# Altium PCB Switch.PcbDoc
Units mm, origin at the board's own origin, x right, y up, seen from the top; angles counter-clockwise.
Board outline 152.4 x 101.6 mm, 2 copper layers (Top Layer, Bottom Layer); 37 components, 15 nets, 84 pads, 28 vias.
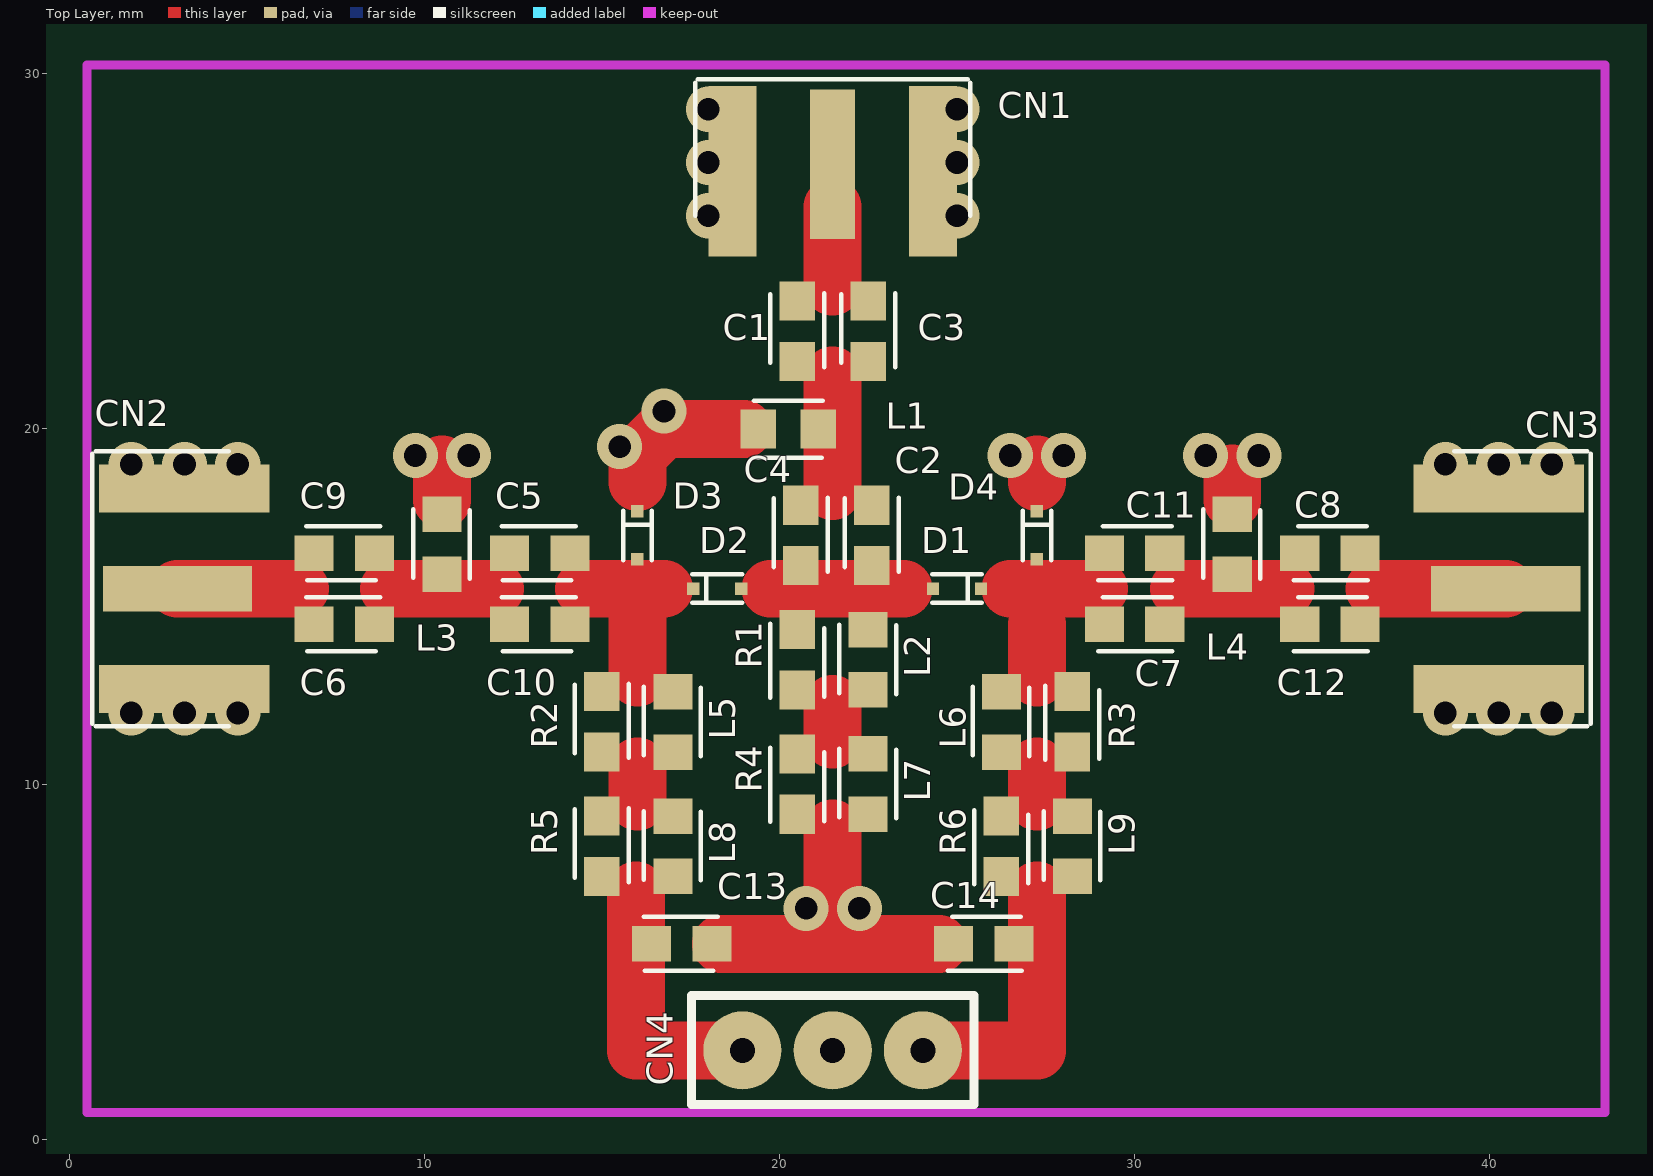
[diagram p0: Top Layer view]
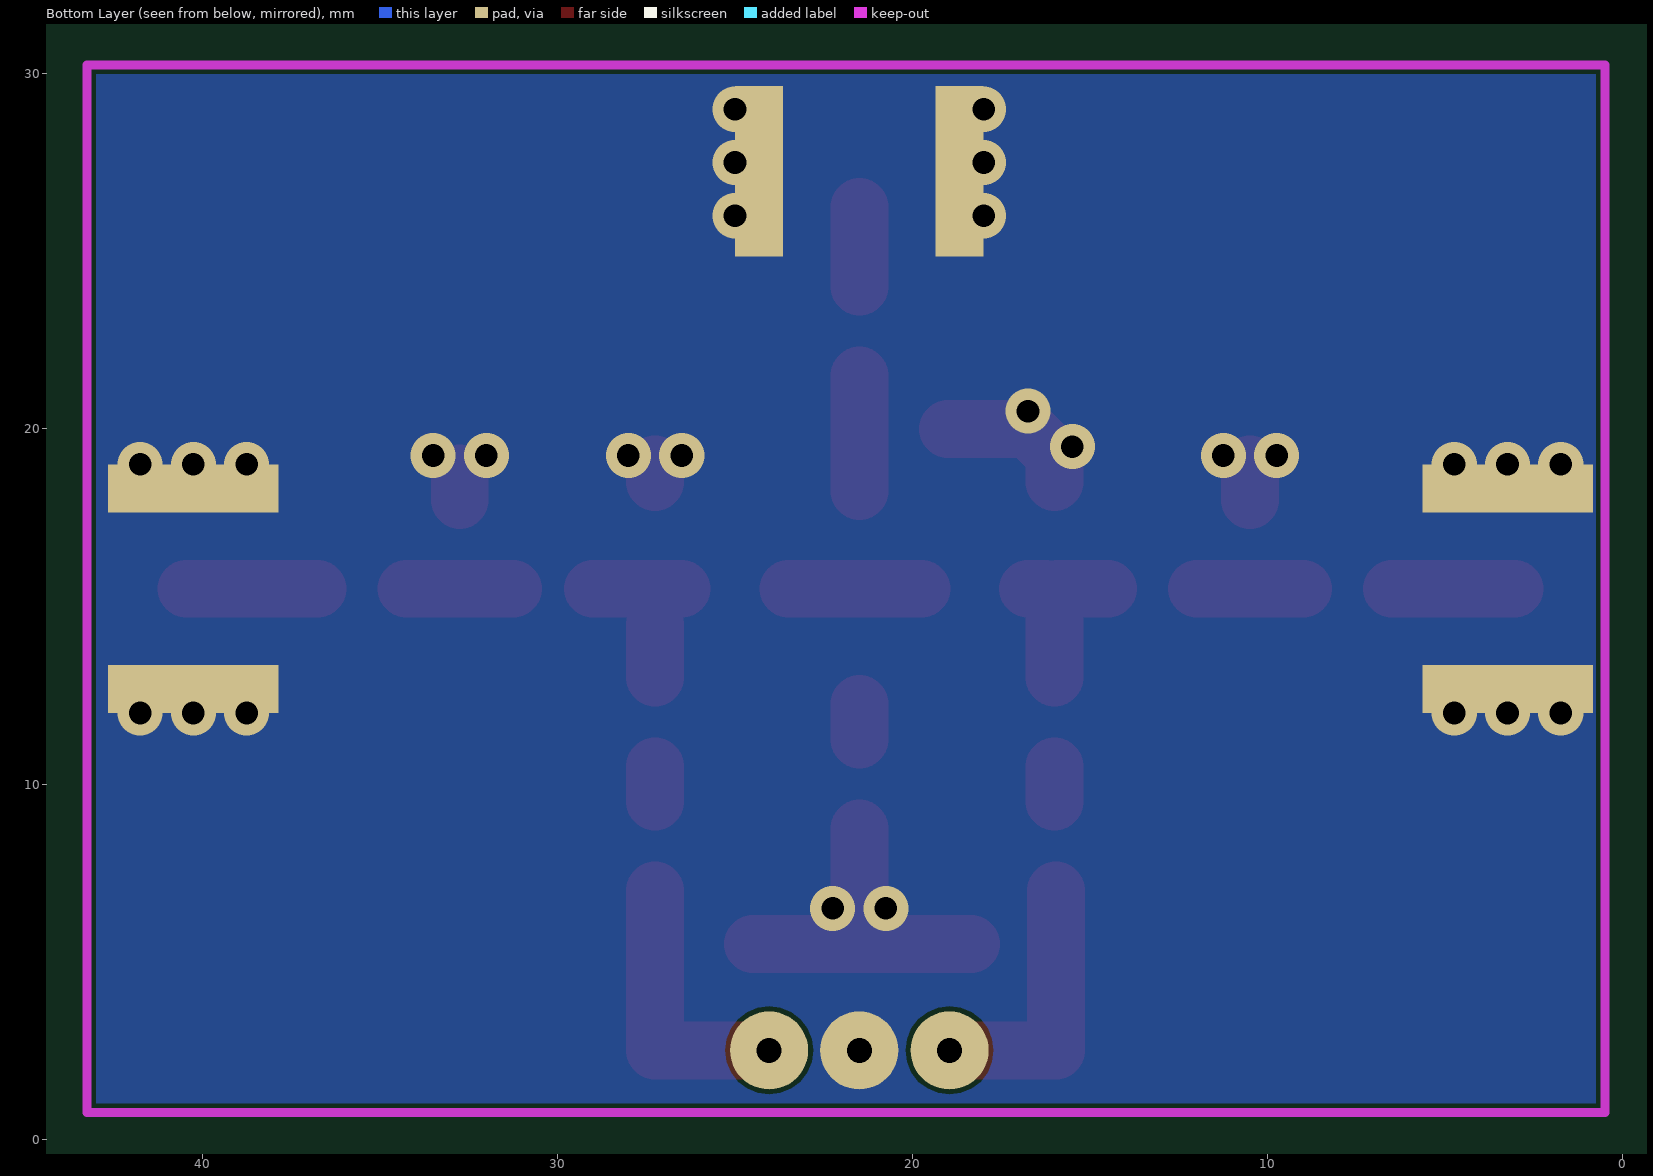
[diagram p1: Bottom Layer view, seen from below]

## Layer stack, top to bottom
Top Solder: solder mask 0.0102, Solder Resist, Dk 3.5
Top Layer: signal copper 0.0356
Dielectric 1: dielectric 0.32, FR-4, Dk 4.8
Bottom Layer: signal copper 0.0356
Bottom Solder: solder mask 0.0102, Solder Resist, Dk 3.5

## Board outline
-34.965,-46.318 117.435,-46.318 117.435,55.282 -34.965,55.282

## Design rules (kind name [scope] priority, off if disabled: settings)
Clearance [All] p1: gap=0.127
PlaneConnect [All] p1: planeconnectstyle=Direct reliefexpansion=0.508 reliefentries=4 reliefconductorwidth=0.254 reliefairgap=0.254
PolygonConnect [All] p1: connectstyle=Direct reliefconductorwidth=0.254 reliefentries=4 polygonreliefangle="90 Angle" airgapwidth=0.254
RoutingCorners [All] p1: cornerstyle=Round minsetback=2.54 maxsetback=2.54
RoutingVias [All] p1: holewidth=0.711 width=1.27 viastyle="Through Hole" minholewidth=0.711 minwidth=1.27 maxholewidth=0.711 maxwidth=1.27
SMDNeckDown [All] p1: percent=50.000
SolderMaskExpansion [All] p1: expansion=0.102
UnpouredPolygon [All] p1: allowunpoured=FALSE
Width [All] p1: maxlimit=1.63 minlimit=1.63 preferedwidth=1.63
27 further rules are at their usual default settings.

## Classes and differential pairs
component class Switch: C1 C2 C3 C4 C5 C6 C7 C8 C9 C10 C11 C12 C13 C14 CN1 CN2 CN3 CN4 D1 D2 D3 D4 L1 L2 L3 L4 L7 L8 L9 R1 R2 R3 R4 R6

## Components (designator, comment, footprint, x,y, rotation, side; value= is the part's Value field where it differs from the comment)
C1 "10pF" C_0603 20.5,22.75 r90 top
C2 "10pF" C_0603 22.6,17 r90 top
C3 "10pF" C_0603 22.5,22.75 r90 top
C4 "10pF" C_0603 20.6,17 r90 top
C5 "10pF" C_0603 13.25,16.5 r180 top
C6 "10pF" C_0603 7.75,14.5 r180 top
C7 "10pF" C_0603 30,14.5 r0 top
C8 "10pF" C_0603 35.5,16.5 r0 top
C9 "10pF" C_0603 7.75,16.5 r180 top
C10 "10pF" C_0603 13.25,14.5 r180 top
C11 "10pF" C_0603 30,16.5 r0 top
C12 "10pF" C_0603 35.5,14.5 r0 top
C13 "10pF" C_0603 17.25,5.5 r180 top
C14 "10pF" C_0603 25.75,5.5 r0 top
CN1 "CON5" SMA 21.5,27.25 r180 top
CN2 "CON5" SMA 3.25,15.5 r270 top
CN3 "CON5" SMA 40.25,15.5 r90 top
CN4 "CON4" CON3 21.5,2.5 r0 top
D1 "Diodo" SC79 25,15.5 r0 top
D2 "Diodo" SC79 18.25,15.5 r180 top
D3 "Diodo" SC79 16,17 r90 top
D4 "Diodo" SC79 27.25,17 r90 top
L1 "22nH" L_0603 20.25,20 r90 top
L2 "22nH" L_0603 22.5,13.5 r0 top
L3 "22nH" L_0603 10.5,16.75 r0 top
L4 "22nH" L_0603 32.75,16.75 r0 top
L5 "22nH" L_0603 17,11.75 r0 top
L6 "22nH" L_0603 26.25,11.75 r0 top
L7 "470nH" L_0603 22.5,10 r0 top
L8 "470nH" L_0603 17,8.25 r0 top
L9 "470nH" L_0603 28.25,8.25 r0 top
R1 "1800Ω" R_0603 20.5,13.5 r270 top
R2 "1800Ω" R_0603 15,11.75 r90 top
R3 "1800Ω" R_0603 28.25,11.75 r270 top
R4 "680Ω" R_0603 20.5,10 r270 top
R5 "680Ω" R_0603 15,8.25 r90 top
R6 "680Ω" R_0603 26.25,8.25 r270 top

## Footprints (in the part's own frame and the unit in brackets; to place one, negate y for a bottom-side part, rotate by r counter-clockwise, add the part's x,y. Pads: shape width x height; smd on the part's side, far side on the other; paste and mask are expansions set on the pad)
C_0603 [mm] "capacitor"
  rect 1.1x1 smd: 1(0.85,0) 2(-0.85,0)
  silkscreen extent -1.02,-0.76 1.07,0.76
CON3 [mm] "tira pines"
  round 2.2 hole 0.7: 1(-2.54,0) 2(0,0) 3(2.54,0)
  silkscreen extent -3.98,-1.53 3.98,1.55
L_0603 [mm] "36521J"
  rect 1.1x1 smd: 1(0,-0.85) 2(0,0.85)
  silkscreen extent -0.81,-0.97 0.79,0.99
R_0603 [mm] "resistor"
  rect 1.1x1 smd: 1(0.85,0) 2(-0.85,0)
  silkscreen extent -1.02,-0.76 1.07,0.76
SC79 [mm] "diodo pin"
  rect 0.35x0.35 smd: A(-0.675,0) K(0.675,0)
  silkscreen extent -0.7,-0.4 0.7,0.4
SMA [mm] "conector SMA"
  rect 1.35x4.8 smd: 1(-2.825,0) 4(2.825,0)
  rect 1.35x4.8 smd far side: 2(-2.825,0) 3(2.825,0)
  rect 1.27x4.2 smd: 5(0,-0.2)
  silkscreen extent -3.88,-2.6 3.88,1.25

## Part data
C1 C2 C3 C4 C5 C6 C7 C8 C9 C10 C11 C12 C13 C14: library part C_0805, "Capacitor"
CN1 CN2 CN3 CN4: "Conector SMA"
D1 D2 D3 D4: "Diodo Pin"
L1 L2 L3 L4 L5 L6 L7 L8 L9: library part L_0805, "Inductor"
R1 R2 R3 R4 R5 R6: library part R_0805, "Resistor"

## Via types
v1: diameter 1.27, hole 0.635, Top Layer to Bottom Layer, 28 vias

## Nets (pads, with @x,y where several pads share a name; then routed paths per layer and width w, separated by ;. In a path a pad name is that pad's centre, name@x,y a point inside that pad or via, vN(x,y) a via of type N, cw(c..) or ccw(c..) an arc to the next point about the centre after c; other vN are vias at no path point)
GND: C13.2 C14.2 CN1.1 CN1.2 CN1.3 CN1.4 CN2.1 CN2.2 CN2.3 CN2.4 CN3.1 CN3.2 CN3.3 CN3.4 CN4.2 D3.K D4.K L1.2 L3.2 L4.2 L7.1 R4.1 | length 14.7
  Top Layer w1.63: L3.2@10.5,18 10.5,19 ; 16,18.5 16,19.25 16.75,20 L1.2@19,20 ; C13.2@18.35,5.5 C14.2@24.5,5.5 ; 21.5,6.5 21.5,8.75 ; 27.25,18.5 27.25,19 ; L4.2@32.75,18 32.75,18.75
  other v1: 20.75,6.5 22.25,6.5 1.75,12 3.25,12 4.75,12 38.75,12 40.25,12 41.75,12 1.75,19 3.25,19 4.75,19 38.75,19 40.25,19 41.75,19 9.75,19.25 11.25,19.25 26.5,19.25 28,19.25 32,19.25 33.5,19.25 15.5,19.5 16.75,20.5 18,26 25,26 18,27.5 25,27.5 18,29 25,29
NetC1_1: C1.1 C3.1 CN1.5 | length 2.3
  Top Layer w1.63: 21.5,24 CN1.5@21.5,26.25
NetC1_2: C1.2 C2.1 C3.2 C4.1 L1.1 | length 3.3
  Top Layer w1.63: 21.5,18.25 21.5,21.5
NetC2_2: C2.2 C4.2 D1.A D2.A L2.2 R1.2 | length 3.8
  Top Layer w1.63: 19.75,15.5 23.5,15.5
NetC5_1: C5.1 C6.2 C9.2 C10.1 L3.1 | length 3
  Top Layer w1.63: 9,15.5 12,15.5
NetC5_2: C5.2 C10.2 D2.K D3.A L5.2 R2.1 | length 4.5
  Top Layer w1.63: 14.5,15.5 15.913,15.5 ; 16,13 16,15.25 16.25,15.5 16.75,15.5
NetC6_1: C6.1 C9.1 CN2.5 | length 3.4
  Top Layer w1.63: CN2.5 6.5,15.5
NetC7_1: C7.1 C8.2 C11.1 C12.2 L4.1 | length 3
  Top Layer w1.63: 31.25,15.5 34.25,15.5
NetC7_2: C7.2 C11.2 D1.K D4.A L6.2 R3.2 | length 4
  Top Layer w1.63: 26.5,15.5 29,15.5 ; 27.25,13 27.25,14.5
NetC8_1: C8.1 C12.1 CN3.5 | length 3.7
  Top Layer w1.63: 36.75,15.5 CN3.5
NetC13_1: C13.1 CN4.1 L8.1 R5.2 | length 7.5
  Top Layer w1.63: 15.96,7 15.96,2.5 CN4.1
NetC14_1: C14.1 CN4.3 L9.1 R6.1 | length 7.7
  Top Layer w1.63: CN4.3@24.08,2.5 27.25,2.5 27.25,7
NetL2_1: L2.1 L7.2 R1.1 R4.2 | length 1
  Top Layer w1.63: 21.5,11.25 21.5,12.25
NetL5_1: L5.1 L8.2 R2.2 R5.1 | length 1
  Top Layer w1.63: 16,9.5 16,10.5
NetL6_1: L6.1 L9.2 R3.1 R6.2 | length 1
  Top Layer w1.63: 27.25,9.5 27.25,10.5

## Polygon pours and split planes (outlines as drawn)
GND on Bottom Layer "GND" (solid, remove dead copper, pour order 3): 0.5,30.25 0.5,0.75 43.25,0.75 43.25,30.25

## Keep-outs
Keep-Out Layer:
  lines w0.254: 0.5,0.75 43.25,0.75 43.25,30.25 0.5,30.25 0.5,0.75

## Silkscreen, mask and mechanical layers (free items; w line width, h text height)
Mechanical 1:
  lines w0.254: 0,0.25 43.75,0.25 43.75,30.75 0,30.75 0,0.25